# Altium PCB OPLink Mini.PcbDoc
Units mil, origin at the board's own origin, x right, y up, seen from the top; angles counter-clockwise.
Board outline 1023.62 x 1968.5 mil, 2 copper layers (Top Layer, Bottom Layer), stack 13.2 mil thick; 35 components, 34 nets, 171 pads, 15 vias.
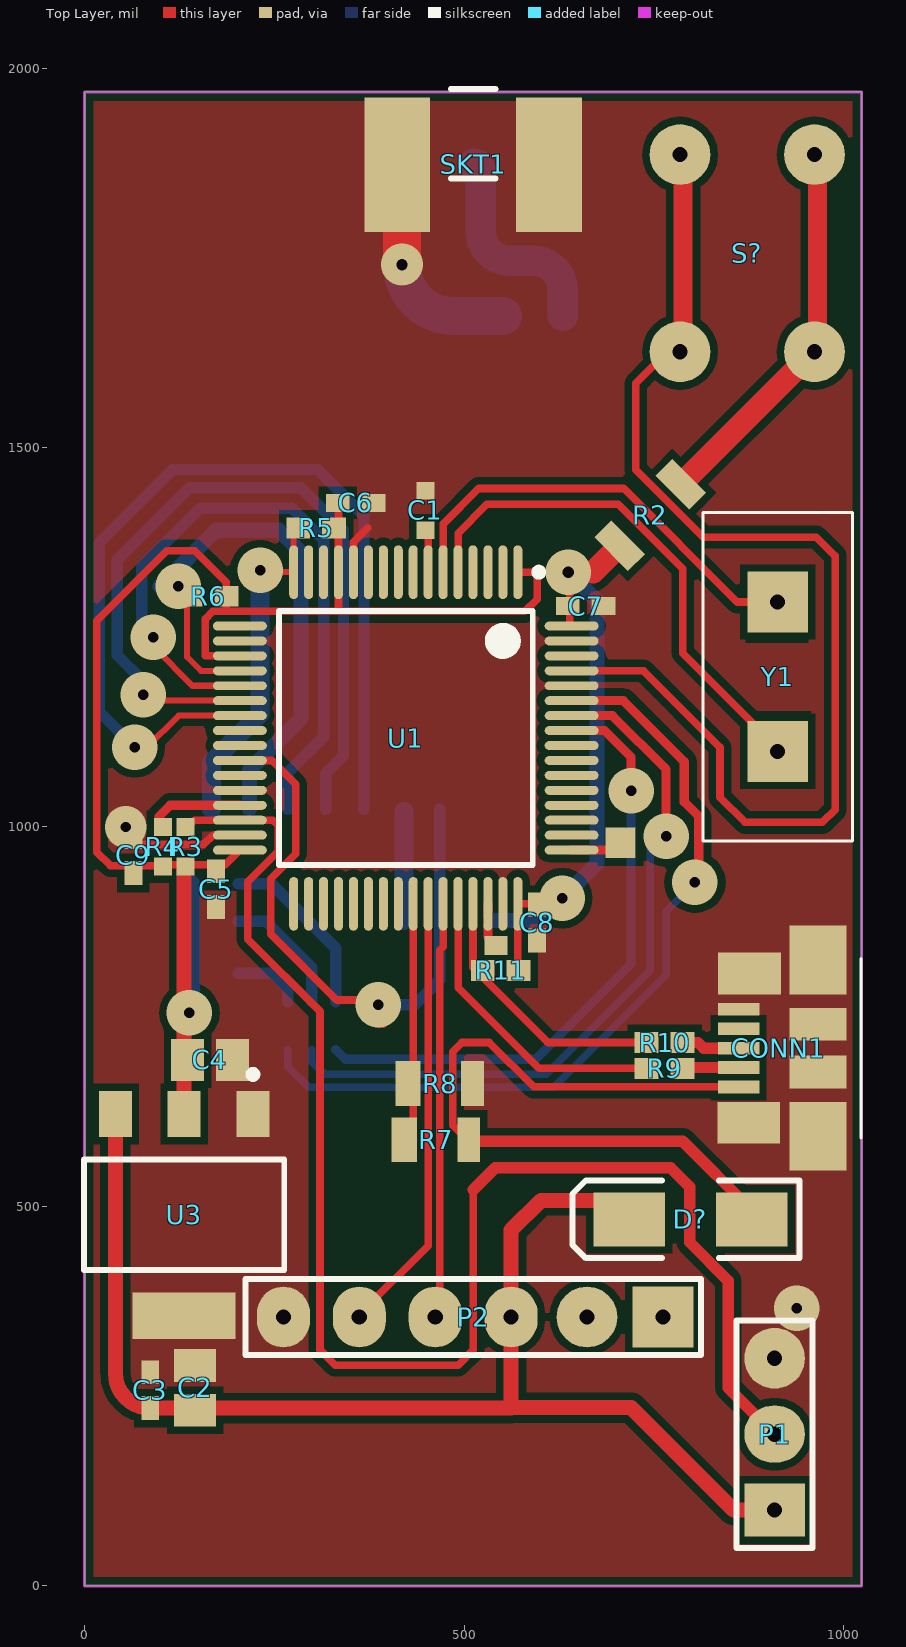
[diagram p0: Top Layer view]
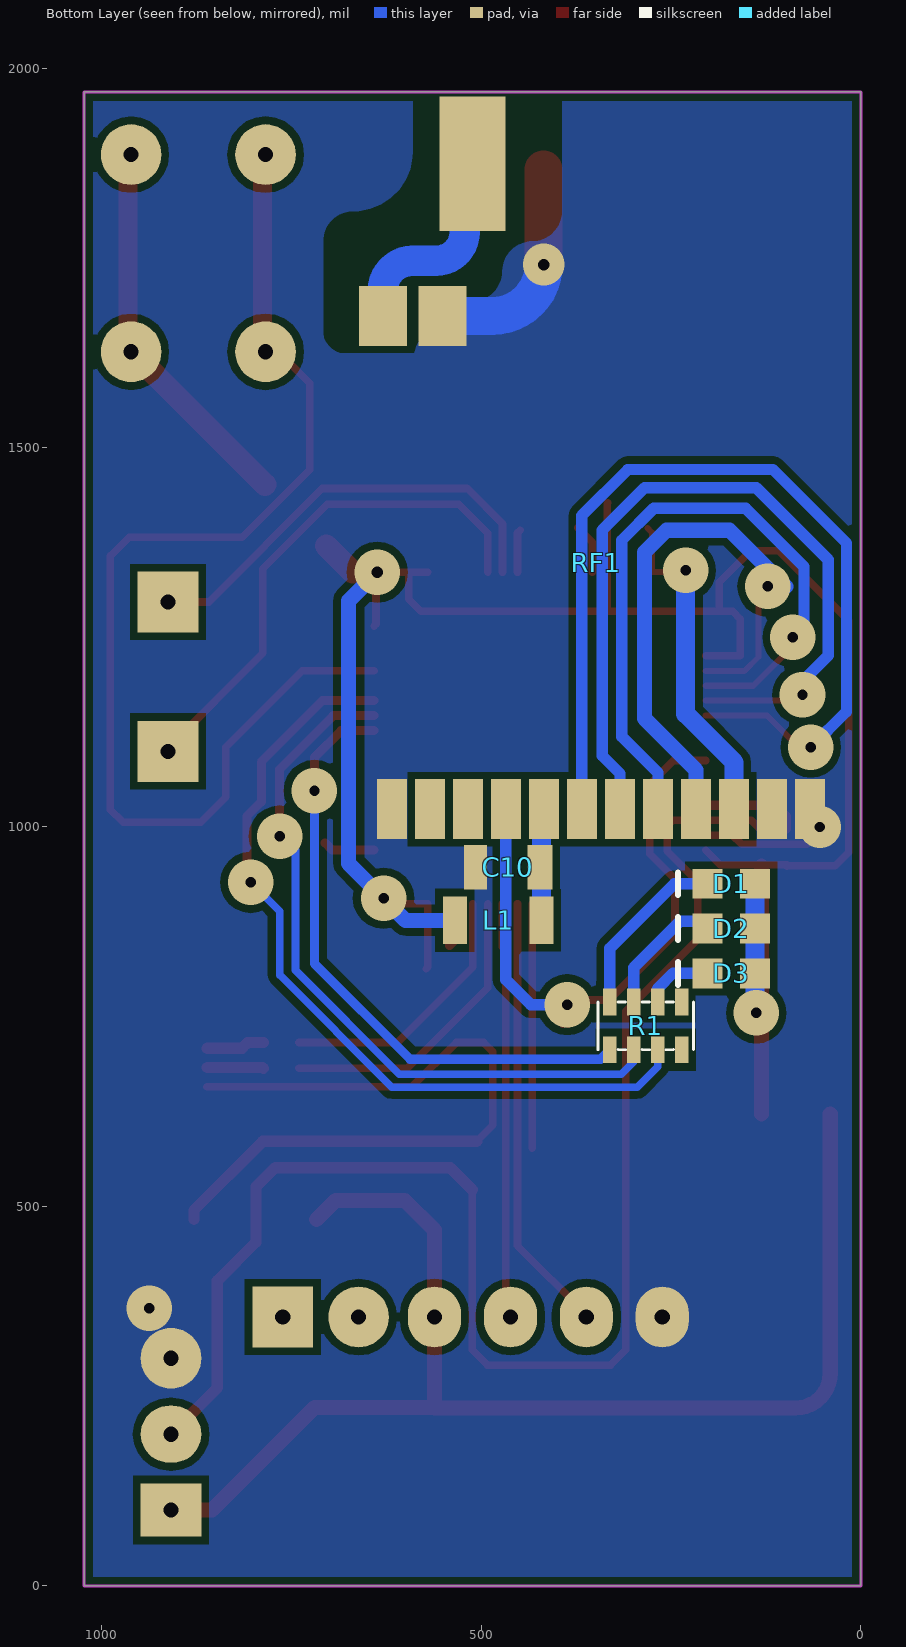
[diagram p1: Bottom Layer view, seen from below]
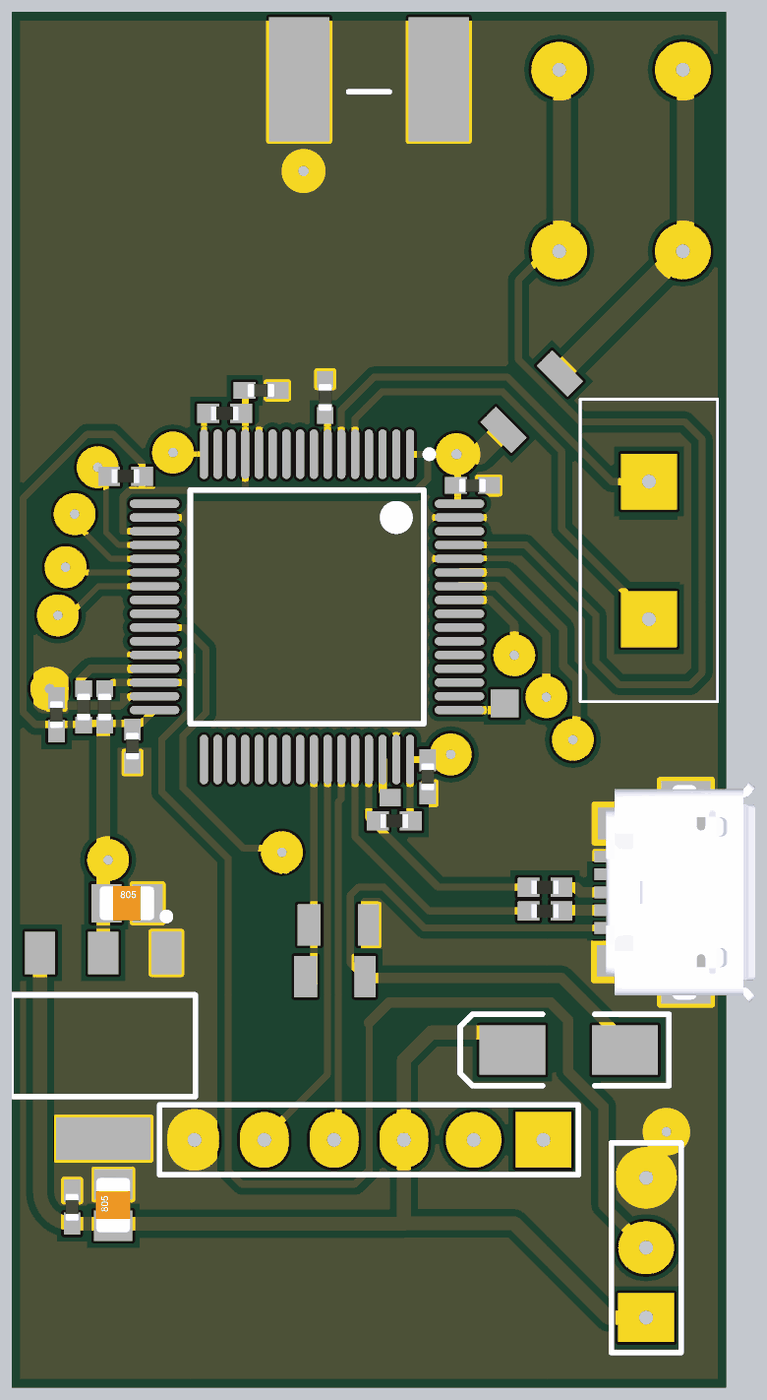
[diagram p2: 3D render of the assembled board from above, using the file's embedded part models]

## Layer stack, top to bottom
Top Solder: solder mask 0.394, Solder Resist, Dk 3.5
Top Layer: signal copper 2.1
Dielectric1: prepreg 9, FR-4, Dk 4.3
Bottom Layer: signal copper 2.1
Bottom Solder: solder mask 0.394, Solder Resist, Dk 3.5

## Board outline
0,0 1023.62,0 1023.62,1968.5 0,1968.5

## Design rules (kind name [scope] priority, off if disabled: settings)
Clearance [All] p1: gap=5 except(10: Arc-Poly Track-Poly SMDPad-Poly THPad-Poly Via-Poly Fill-Poly Poly-Poly)
ComponentClearance [All] p1 off: gap=10 collisioncheckmode=3 verticalgap=10 showdistances=FALSE
DiffPairsRouting [All] p1: maxlimit=10 minlimit=10 mostfreqgap=10 toplayer_minwidth=15 toplayer_maxwidth=15 toplayer_prefwidth=15 bottomlayer_minwidth=15 bottomlayer_maxwidth=15 bottomlayer_prefwidth=15 maxuncoupledlength=500
FabricationTestPointUsage TestPointUsage [All] p1: valid=0 allowmultiple=FALSE
FabricationTestpoint Testpoint [All] p1: side=3 testpointundercomponent=TRUE minsize=40 maxsize=100 preferedsize=60 minholesize=0 maxholesize=40 preferedholesize=32 testpointgrid=1 allowsidetop=TRUE allowsidebottom=TRUE usegrid=TRUE gridtolerance=0.01
HoleSize [All] p1: absolutevalues=TRUE maxlimit=160 minlimit=13 maxpercent=80.000 minpercent=20.000
MinimumSolderMaskSliver [All] p1: minsoldermaskwidth=3
PolygonConnect [All] p1: connectstyle=Direct reliefconductorwidth=15 reliefentries=4 polygonreliefangle="90 Angle" airgapwidth=10
RoutingVias [All] p1: holewidth=13.78 width=60 viastyle="Through Hole" minholewidth=11.81 minwidth=55 maxholewidth=31.5 maxwidth=80
SilkToSilkClearance [All] p1: silktosilkclearance=6
SilkToSolderMaskClearance SilkscreenOverComponentPads [IsPad] p1: minsilkscreentomaskgap=3 clearancetoexposedcopper=TRUE
SolderMaskExpansion [All] p1: expansion=4
Width [All] p1: maxlimit=80 minlimit=8 preferedwidth=10 minimp=50.000000 maximp=50.000000 favimp=50.000000
22 further rules are at their usual default settings.

## Classes and differential pairs
differential pair USB_R: +USB_R_P -USB_R_N

## Components (designator, comment, footprint, x,y, rotation, side; value= is the part's Value field where it differs from the comment)
C1 "Cap402" 0402x 449,1417 r270 top
C2 "Cap805" CAP805L 145.35,261 r90 top
C3 "10n" CAP402N 86.35,258 r90 top
C4 "Cap805" CAP805L 165,693 r0 top
C5 "10n" CAP402N 173,918 r270 top
C6 "Cap402" CAP402N 357,1427 r0 top
C7 "Cap402" CAP402N 660,1291 r0 top
C8 "Cap402" CAP402N 596,874 r270 top
C9 "Cap402" CAP402N 64,963 r90 top
C10 "Cap402" 0805x 465,947 r180 bottom
CONN1 "Micro USB B" Micro_USB 966,708.66 r90 top
D1 "Status" LED603N 170.87,925.2 r180 bottom
D2 "RX" LED603N 170.87,866.14 r180 bottom
D3 "TX" LED603N 170.87,807.09 r180 bottom
D? "Diode" SMA 798,483 r180 top
L1 "300mA" 1206x 478,877 r180 bottom
P1 "Header 3" HDR1X3 909,100 r90 top
P2 "Header 6" HDR1X6 761.81,354.33 r180 top locked
R1 "100R" RES_ARRAY_4X 252,738 r0 bottom (schematic designator R204)
R2 "Res402" 1206x 745,1411 r225 top
R3 "Res402" 0402x 133,974 r270 top
R4 "Res402" 0402x 103,974 r270 top
R5 "Res402" RES402N 305,1394 r180 top
R6 "Res402" RES402N 163,1304 r180 top
R7 "Res402" 0805x 463,588 r180 top
R8 "Res402" 0805x 468,662 r180 top
R9 "Res402" RES402N 764,682 r0 top
R10 "Res402" RES402N 764,716 r0 top
R11 "Res402" RES402N 548,811 r0 top
RF1 "RFM22B" RFM22B 0,1023.62 r90 bottom locked
S? "SW-PB" BTN_STD 873,1756 r90 top
SKT1 "MMCX Thru hole" SMA_CORNER 511.81,1972.44 r0 top
U1 "STM32F103RBT6" LQFP64_N 423,1117.19 r270 top
U3 "REG1117-3.3" ZZ311 131,489 r180 top
Y1 "XTAL" CRYSTAL 913,1198 r90 top

## Footprints (in the part's own frame and the unit in brackets; to place one, negate y for a bottom-side part, rotate by r counter-clockwise, add the part's x,y. Pads: shape width x height; smd on the part's side, far side on the other; paste and mask are expansions set on the pad)
0402x [mm] "Chip Capacitor, Body 1.0x0.5mm, IPC Medium Density"
  rect 0.6x0.6 smd: 1(-0.66,0) 2(0.66,0)
  body extent -0.5,-0.25 0.5,0.25, height 0.6
0805x [mil] "Chip Resistor; Body 2 x 1.3 mm (LxW typ)"
  rect 33x59.06 smd: 1(42,0)
  rect 30x59.06 smd: 2(-43,0)
1206x [mm]
  rect 0.8x1.6 smd: 1(-1.45,0) 2(1.45,0)
BTN_STD [mil]
  round 80 hole 20: 1(-129.92,88.58) 1(129.92,88.58) 2(-129.92,-88.58) 2(129.92,-88.58)
CAP402N [mm] "Chip Capacitor, Body 1.0x0.5mm, IPC Medium Density"
  rect 0.8x0.6 smd: 1(-0.6,0) 2(0.6,0)
  body extent -0.5,-0.25 0.5,0.25, height 0.6
CAP805L [mm] "Chip Capacitor, Body 2.0x1.3mm, IPC High Density"
  rect 1.1x1.4 smd: 1(-0.75,0) 2(0.75,0)
  body extent -1,-0.62 1,0.63, height 0.78
CRYSTAL [mil]
  rect 80x80 hole 20: 1(98.43,0) 2(-98.43,0)
  silkscreen extent -217,-98 217,98
HDR1X3 [mil] "Connector; Header; 3 Position"
  rect 70x80 hole 20: 1(0,0)
  oval 75x80 hole 20: 2(100,0)
  round 80 hole 20: 3(200,0)
  silkscreen extent -50,-50 250,50
HDR1X6 [mil] "Connector; Header; 6 Position"
  rect 80x80 hole 20: 1(0,0)
  round 80 hole 20: 2(100,0)
  oval 70x80 hole 20: 3(200,0) 4(300,0) 5(400,0) 6(500,0)
  silkscreen extent -50,-50 550,50
LED603N [mm] "Chip LED, Body 1.6x0.8mm, IPC Medium Density"
  rect 1x1 smd: 1(-0.8,0) 2(0.8,0)
  silkscreen extent -1.78,-0.38 -1.78,0.38, body extent -0.82,-0.38 0.83,0.34, height 0.68
LQFP64_N [mm] "Thin QFP, 64-Leads, Body 10x10mm, Pitch 0.5mm, IPC Medium Density"
  oval 1.8x0.3 smd: 1(-5.55,3.75) 2(-5.55,3.25) 3(-5.55,2.75) 4(-5.55,2.25) 5(-5.55,1.75) 6(-5.55,1.25) 7(-5.55,0.75) 8(-5.55,0.25) 9(-5.55,-0.25) 10(-5.55,-0.75) 11(-5.55,-1.25) 12(-5.55,-1.75) 13(-5.55,-2.25) 14(-5.55,-2.75) 15(-5.55,-3.25) 16(-5.55,-3.75) 33(5.55,-3.75) 34(5.55,-3.25) 35(5.55,-2.75) 36(5.55,-2.25) 37(5.55,-1.75) 38(5.55,-1.25) 39(5.55,-0.75) 40(5.55,-0.25) 41(5.55,0.25) 42(5.55,0.75) 43(5.55,1.25) 44(5.55,1.75) 45(5.55,2.25) 46(5.55,2.75) 47(5.55,3.25) 48(5.55,3.75)
  oval 0.3x1.8 smd: 17(-3.75,-5.55) 18(-3.25,-5.55) 19(-2.75,-5.55) 20(-2.25,-5.55) 21(-1.75,-5.55) 22(-1.25,-5.55) 23(-0.75,-5.55) 24(-0.25,-5.55) 25(0.25,-5.55) 26(0.75,-5.55) 27(1.25,-5.55) 28(1.75,-5.55) 29(2.25,-5.55) 30(2.75,-5.55) 31(3.25,-5.55) 32(3.75,-5.55) 49(3.75,5.55) 50(3.25,5.55) 51(2.75,5.55) 52(2.25,5.55) 53(1.75,5.55) 54(1.25,5.55) 55(0.75,5.55) 56(0.25,5.55) 57(-0.25,5.55) 58(-0.75,5.55) 59(-1.25,5.55) 60(-1.75,5.55) 61(-2.25,5.55) 62(-2.75,5.55) 63(-3.25,5.55) 64(-3.75,5.55)
  silkscreen extent -5.67,-4.25 4.25,4.58, body extent -5,-5 5,5, height 1.6
Micro_USB [mm] "Digikey WM17141CT-ND"
  rect 2.3x1.9 smd paste-0.051: 0(-2.946,0) 0(2.946,0)
  rect 1.4x2.1 smd paste-0.127: 0(-2.5,2.311) 0(2.5,2.286)
  rect 1.1x1.9 smd paste-0.203: 0(-0.8,0) 0(0.8,0)
  rect 0.425x1.38 smd mask+0.064: 1(-1.3,2.65) 2(-0.65,2.65) 3(0,2.65) 4(0.65,2.65) 5(1.3,2.65)
  silkscreen extent -3,-1.45 3,-1.45, body extent -3.99,-2.53 3.99,2.9, height 2.69
RES402N [mm] "Chip Resistor, Body 1.1x0.5mm, IPC Medium Density"
  rect 0.8x0.7 smd: 1(-0.6,0) 2(0.6,0)
  body extent -0.5,-0.25 0.5,0.25, height 0.27
RES_ARRAY_4X [mm]
  rect 0.45x0.9 smd: 1(-0.4,0.8) 2(-0.4,-0.8) 3(0.4,0.8) 4(0.4,-0.8) 5(1.2,0.8) 6(1.2,-0.8) 7(2,0.8) 8(2,-0.8)
  silkscreen extent -0.8,-0.8 2.4,0.8
RFM22B [mm]
  rect 2x1 smd: 1(0,1.7) 2(0,2.973) 3(0,4.245) 4(0,5.518) 5(0,6.791) 6(0,8.064) 7(0,9.336) 8(0,10.609) 9(0,11.882) 10(0,13.155) 11(0,14.427) 12(0,15.7)
  rect 2x1.6 smd: 13(16.5,16) 14(16.5,14)
SMA [mm] "DO-214-AC/SMA; 2 C-Bend Leads; Body 5 x 2.7 mm, inc. leads (LxW)"
  rect 2.4x1.8 smd: 1(-2.05,0) 2(2.05,0)
  silkscreen extent -3.65,-1.3 3.95,1.3
SMA_CORNER [mm]
  rect 2.2x4.5 smd far side: 1(0,-2.5)
  rect 2.2x4.5 smd: 2(-2.54,-2.54) 2(2.54,-2.54)
  silkscreen extent -0.75,-3 0.75,0
ZZ311 [mm] "SOT-223/SC-73; 4 Leads; Body 6.7 x 7.3 mm, inc. leads (LxW max)"
  rect 1.1x1.55 smd: 1(-2.3,-3.375) 2(0,-3.375) 3(2.3,-3.375)
  rect 3.45x1.55 smd: 4(0,3.375)
  silkscreen extent -3.35,-4.82 3.35,1.85

## Part data
C1 C2 C4 C6 C7 C8 C9 C10: "Capacitor SMD"
C3 C5: library part Cap402, "Capacitor SMD"
CONN1: library part "USB Micro B SMT", "USB Micro B SMT Socket"
D1: library part "LED 603 Bl", "Blue 603 LED"
D2: library part "LED 603 Or", "Orange 603 LED"
D3: library part "LED 603 Yellow", "Yellow 603 LED"
D?: "Default Diode"
L1: library part FerriteBead_300mA, "Ferrite Bead 300mA"
P1: "Header, 3-Pin"
P2: "Header, 6-Pin"
R1: library part RES_Array_4x, "742C0431000FP"
R2 R3 R4 R5 R6 R7 R8 R9 R10 R11: "Resistor SMD"
RF1: library part RFM22B-S2, "UHF 100mW Transceiver"
S?: "Switch"
SKT1: "MMCX Socket"
U1: "STM32 ARM-based 32-bit MCU with 128 Kbytes Flash, 64-pin LQFP, Industrial Temperature"
U3: "800mA and 1A Low Dropout Positive Regulator 2.85V, 3.3V, 5V, and Adjustable"
Y1: "Crystal Oscillator"

## Free pads (board coordinates)
  rect 30x25 smd: 2(542,844)
  rect 40x40 smd: 2(706,979)

## Via types
v1: diameter 60, hole 13.78, Top Layer to Bottom Layer, 12 vias
v2: diameter 55, hole 13.78, Top Layer to Bottom Layer, 1 vias
v3: diameter 60, hole 15, Top Layer to Bottom Layer, 1 vias
v4: diameter 55, hole 15, Top Layer to Bottom Layer, 1 vias

## Nets (pads, with @x,y where several pads share a name; then routed paths per layer and width w, separated by ;. In a path a pad name is that pad's centre, name@x,y a point inside that pad or via, vN(x,y) a via of type N, cw(c..) or ccw(c..) an arc to the next point about the centre after c; other vN are vias at no path point)
ANT: RF1.13 SKT1.1 | length 281.5
  Bottom Layer w40: SKT1.1 cw(c511.81,1863.83) 522,1863.83 522,1784 ccw(c560,1784) 560,1746 591,1746 cw(c591,1707.08) 629.92,1707.08 RF1.13
GND: C1.1 C2.2 C3.2 C4.2 C5.2 C6.2 C7.2 C8.2 C9.2 C10.2 CONN1.0 CONN1.5 P1.3 P2.6 R8.2 RF1.1 RF1.2 RF1.12 RF1.14 SKT1.2 U1.12 U1.18 U1.28 U1.31 U1.47 U1.60 U1.63 U3.1 U3.4 | length 501.8
  Top Layer w10: C9.2@71,977 157,977 169.24,989.24 U1.31 ; U1.12 354.1,1375.1 373,1394
  Top Layer w50: v4(418,1741) SKT1.2@418,1866.25
  Bottom Layer w50: v4(418,1741) ccw(c485.77,1741) 485.77,1673.23 RF1.14
  other v1: 938,366
  other v2: 54,1000
GPIO2: RF1.9 U1.26 | length 843.9
  Top Layer w10: U1.26 246.7,1087.66 278,1056.36 278,965 245,932 245,859 332,772 367,772 393,746 v1@393,740 ; v1@386,740 387,741 v1(387,766)
  Bottom Layer w15: v1(387,766) 435,766 467.79,798.79 RF1.9
"MDM INT": R5.2 RF1.3 U1.16 | length 446.9
  Top Layer w8: v1(231,1338) 233.31,1335.69 U1.16 275.36,1387.98 R5.2
  Bottom Layer w25: RF1.3 167.14,1085.14 231,1149 v1(231,1338)
NetC1_2: C1.2 U1.7 | length 56.8
  Top Layer w10: C1.2 452.53,1387.47 U1.7
NetC10_1: C10.1 L1.2 RF1.8 | length 148
  Bottom Layer w15: RF1.8 RF1.8@420.91,1020.39
  Bottom Layer w25: L1.2 RF1.8@420.91,1020.39
NetD1_1: D1.1 R1.8 | length 234.3
  Bottom Layer w15: D1.1 245.8,925.2 330.74,840.26 R1.8
NetD2_1: D2.1 R1.6 | length 167.5
  Bottom Layer w15: D2.1@202.37,875.98 238.02,875.98 299.24,814.76 R1.6
NetD3_1: D3.1 R1.4 | length 91.7
  Bottom Layer w15: D3.1 247.09,807.09 247.5,807.5 267.75,787.25 R1.4
NetR1_3: R1.3 U1.59 | length 1081.6
  Top Layer w12: U1.59 709.6,1166.4 790,1086 790,1033 809,1014 809,932 v1(804,927)
  Bottom Layer w10: R1.3 267.75,684.25 295,657 618,657 766,805 766,889 v1(804,927)
NetR1_5: R1.5 U1.58 | length 954.4
  Top Layer w12: U1.58 695.28,1146.72 766,1076 v1(766,988)
  Bottom Layer w10: R1.5 299.24,690.76 316,674 608,674 745,811 745,970 763,988 v1(766,988)
NetR1_7: R1.7 U1.57 | length 811.6
  Top Layer w12: U1.57 684.97,1127.03 720,1092 v1(720,1048)
  Bottom Layer w12: R1.7 343.25,694 594,694 720,820 v1(720,1048)
NetR2_1: R2.1 S?.2 | length 530.2
  Top Layer w8: S?.2@965.58,1631.58 S?.2@965.58,1647.08
  Top Layer w25: S?.2@965.58,1647.08 S?.2@965.58,1906.92
  Top Layer w30: R2.1 S?.2@965.58,1631.58
NetR4_1: R4.1 U1.29 | length 128.9
  Top Layer w12: R4.1@98,997.62 98,1014 112.61,1028.61 U1.29
NetS?_1: S?.1 U1.61 | length 1581.9
  Top Layer w10: U1.61 736.23,1205.77 837,1105 837,1039 870,1006 972,1006 989,1023 989,1357 964,1382 815,1382 726,1471 726,1584.66 S?.1@788.42,1647.08
  Top Layer w25: S?.1@788.42,1647.08 S?.1@788.42,1906.92
NetU1_5: U1.5 Y1.2 | length 690.5
  Top Layer w10: U1.5 491.9,1386.9 530,1425 703,1425 788,1340 788,1229 913,1104 Y1.2
NetU1_6: U1.6 Y1.1 | length 585.6
  Top Layer w10: U1.6 472.21,1399.21 519,1446 710,1446 859.57,1296.43 Y1.1
"PPM IN": P1.2 R3.1 U1.30 | length 1985.9
  Top Layer w10: R3.1@133,997.62 144.3,1008.92 U1.30 247.92,1008.92 248,1009 255,1002 255,968 215,928 215,852 310,757 310,311 330,291 492,291 512,311 512,522
  Top Layer w15: 512,522 541,551 772,551 797,526 797,453 848,402 848,261 P1.2
SENSE: R7.1 R8.1 U1.41 | length 321.7
  Top Layer w10: R7.1@432.84,577 U1.41
SPI1_MISO: RF1.6 U1.22 | length 1079.1
  Top Layer w8: v1@55.2,1174 v1(77,1174) ; v1@77,1166.4 U1.22
  Bottom Layer w15: v1(77,1174) 77,1192 43,1226 43,1352 138,1447 285,1447 341,1391 341,1094 317.47,1070.47 RF1.6
SPI1_MOSI: RF1.7 U1.23 | length 1245.2
  Top Layer w8: v1(66,1105) 82,1105 123.72,1146.72 U1.23
  Bottom Layer w15: v1(66,1105) 19,1152 19,1374 116,1471 307,1471 368,1410 368,1024.05 RF1.7
SPI1_NSS: R6.2 RF1.4 U1.20 | length 788.6
  Top Layer w8: v1@117,1309 135,1291 135,1224 153.23,1205.77 U1.20
  Bottom Layer w20: v1(123,1317) 99,1317 173,1391 256,1391 285,1362 285,1143 217.25,1075.25 RF1.4
SPI1_SCK: RF1.5 U1.21 | length 946
  Top Layer w8: v1(90,1250) 76,1236 92,1236 141.91,1186.09 U1.21
  Bottom Layer w15: v1(90,1250) 71,1250 75,1254 75,1343 152,1420 273,1420 315,1378 315,1119 267.36,1071.36 RF1.5
SWCLK: pad.2@706,979 U1.49 | length 68.4
  Top Layer w12: U1.49 696.55,969.55 pad.2@706,979
SWDIO: pad.2@542,844 U1.46 | length 59.1
  Top Layer w12: U1.46 531.27,854.73 pad.2@542,844
USART1_RX: P2.4 U1.43 | length 548.7
  Top Layer w8: P2.4 P2.4@468,360.52
  Top Layer w10: P2.4@468,360.52 468,837.79 472.21,842 U1.43
USART1_TX: P2.5 U1.42 | length 581.9
  Top Layer w10: P2.5 361.81,357.81 452.53,448.53 U1.42
USB_M: R9.1 U1.44 | length 403
  Top Layer w10: U1.44 491.9,788.1 598,682 R9.1
USB_P: R10.1 R11.1 U1.45 | length 353.2
  Top Layer w10: U1.45 511.58,815.42 611,716 R10.1
USB_PWR: CONN1.1 D?.1 R7.2 | length 952.3
  Top Layer w10: R7.2@504,588 485,607 485,704 497,716 533,716 591.52,657.48 CONN1.1
  Top Layer w15: R7.2@506,586 788,586 878.71,495.29 D?.1
USB_R_N: CONN1.2 R9.2 | length 74.5
  Top Layer w15: R9.2 788.69,683.07 CONN1.2
USB_R_P: CONN1.3 R10.2 | length 77.1
  Top Layer w15: R10.2 808,716 815.34,708.66 CONN1.3
VCC: C4.1 C5.1 C6.1 C7.1 C8.1 C9.1 D1.2 D2.2 D3.2 L1.1 R2.2 R3.2 R4.2 R5.1 R6.1 R11.2 U1.1 U1.13 U1.19 U1.32 U1.48 U1.64 U3.2 | length 2935.3
  Top Layer w10: R4.2@98,948 97,949 34,949 16,967 16,1272 108,1364 145,1364 186.62,1322.38 R6.1 186.62,1285.62 185,1284 ; R4.2@98,950.38 R3.2@133,950.38 ; R3.2@131,948.38 R3.2@133,950.38 ; U1.32 185.32,950.38 R3.2@133,950.38 ; U1.19 159.22,1225.46 159,1225.68 159,1274 169,1284 185,1284 ; C6.1 334.42,1425.96 U1.13 334.42,1284 ; U1.1 596,1335.69 ; R11.2@572.62,813 570.64,814.98 U1.48 621.68,898.69 v1(629,906) ; U1.64 639,1267.33 639,1334 v3(637.31,1335.69) ; 669.69,1335.69 v3(637.31,1335.69) ; 185,1284 334.42,1284 ; 334.42,1284 580,1284 596,1300 596,1335.69 ; 596,1335.69 v3(637.31,1335.69)
  Top Layer w20: U3.2 R3.2@131,948.38
  Top Layer w30: 669.69,1335.69 R2.2
  Bottom Layer w20: L1.1 600,877 v1(629,906) 675,952 675,1298 v3(637.31,1335.69)
  Bottom Layer w25: v1(138,755) 139.37,755 D3.2 D1.2
VCC_UNREG: C2.1 C3.1 D?.2 P1.1 P2.3 U3.3 | length 1709
  Top Layer w20: U3.3 40.45,280.28 ccw(c86.35,280.28) C3.1 561.81,234.38 ; D?.2 692.29,508 601,508 561.81,468.81 P2.3 561.81,234.38 ; P1.1 855,100 720,235 562.43,235 561.81,234.38
pads on no net: CONN1.4 P2.1 P2.2 R1.1 R1.2 RF1.10 RF1.11 U1.2 U1.3 U1.4 U1.8 U1.9 U1.10 U1.11 U1.14 U1.15 U1.17 U1.24 U1.25 U1.27 U1.33 U1.34 U1.35 U1.36 U1.37 U1.38 U1.39 U1.40 U1.50 U1.51 U1.52 U1.53 U1.54 U1.55 U1.56 U1.62

## Polygon pours and split planes (outlines as drawn)
GND on Bottom Layer "TOP_+" (solid, remove dead copper, pour order 17): 0,0 1023.62,0 1023.62,1968.5 0,1968.5
GND on Top Layer "TOP_+" (solid, remove dead copper, pour order 15): 0,0 1023.62,0 1023.62,1968.5 0,1968.5

## Keep-outs
Keep-Out Layer:
  the board outline again, w3.94

## Other copper
Top Layer:
  pour cut-out: 873.5,1152 873.5,1108 957.5,1108 957.5,1153 880.5,1153
  pour cut-out: 870,1286 870,1242 954,1242 954,1287 877,1287
Bottom Layer:
  pour cut-out: 393.7,1968.5 393.7,1811.02 ccw(c433.07,1811.02) 433.07,1771.65 cw(c433.07,1732.28) 472.44,1732.28 ccw(c511.81,1732.28) 511.81,1692.91 590.55,1692.91 551.18,1692.91 551.18,1653.54 cw(c554.96,1620.08) 588.42,1623.86 678.98,1623.86 ccw(c678.98,1653.54) 708.66,1653.54 708.66,1771.65 ccw(c669.29,1771.65) 669.29,1811.02 cw(c669.29,1889.76) 590.55,1889.76 590.55,2007.87